# Altium PCB LSRO1AltiumTest.PcbDoc
Units mm, origin at the board's own origin, x right, y up, seen from the top; angles counter-clockwise.
Board outline 152.4 x 101.6 mm, 2 copper layers (Top Layer, Bottom Layer); 10 components, 0 nets, 189 pads, 0 vias.
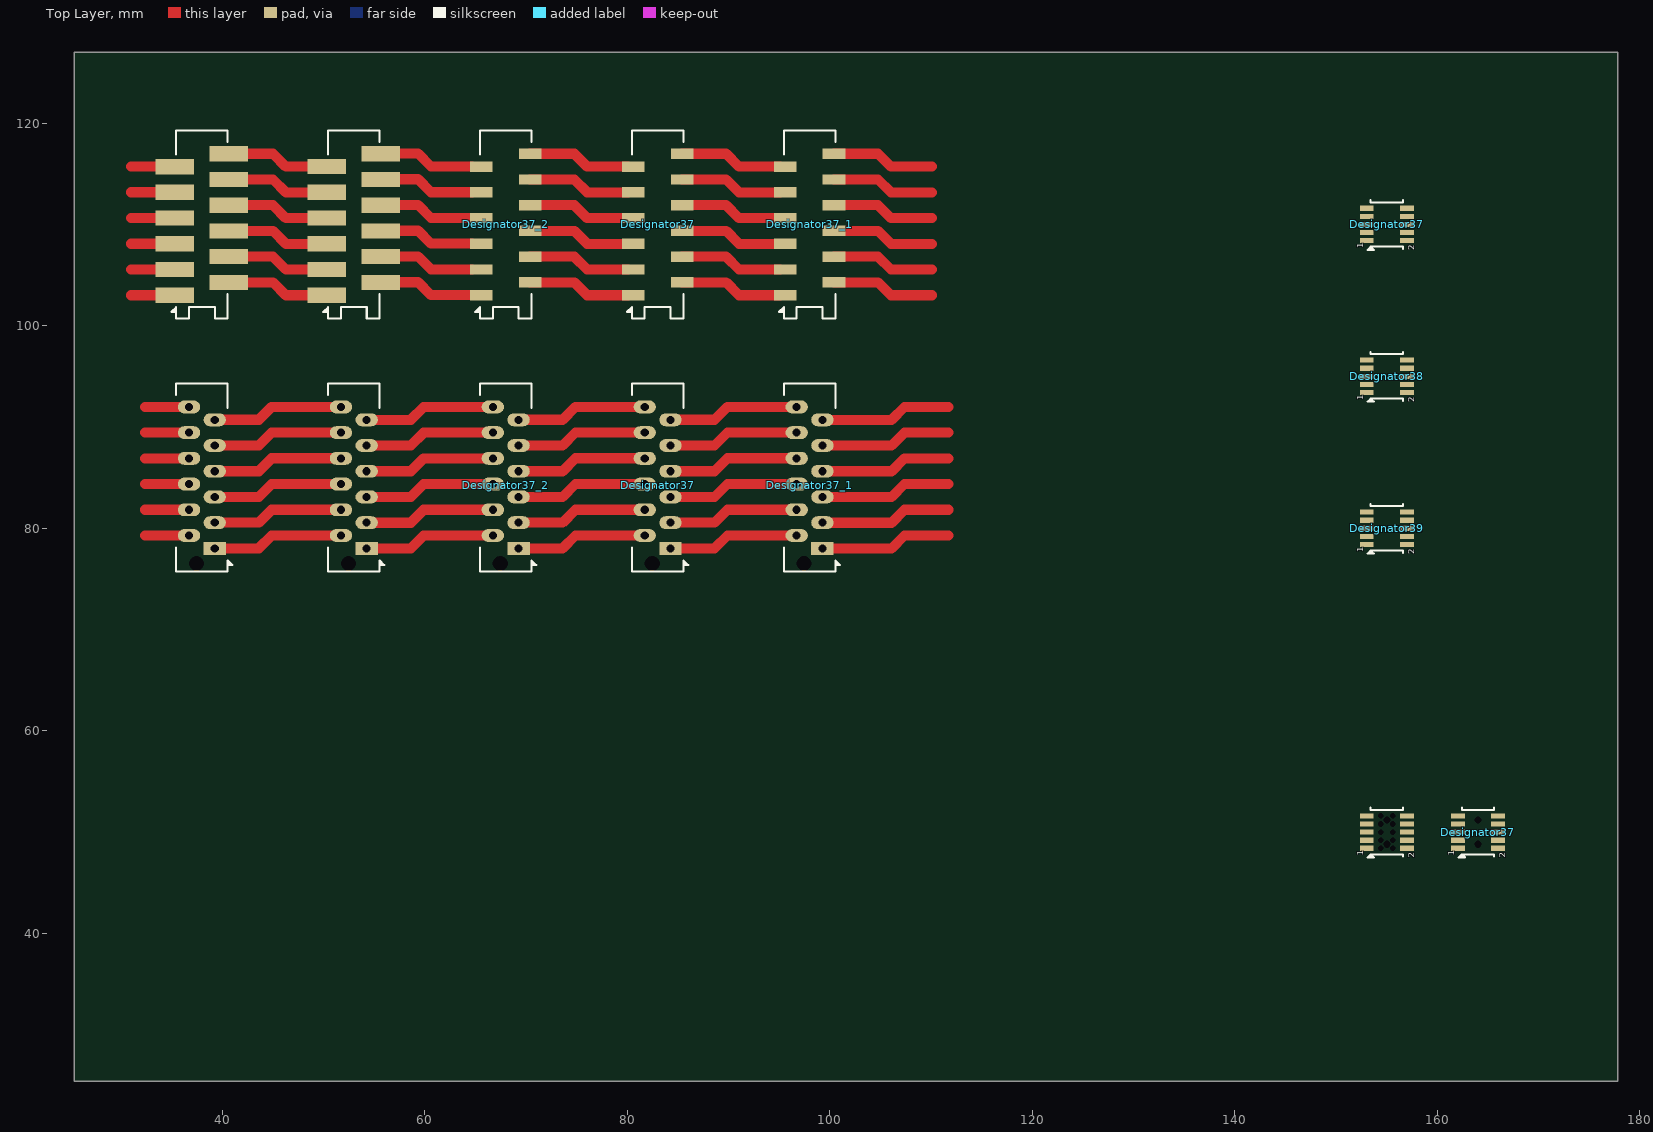
[diagram p0: Top Layer view]
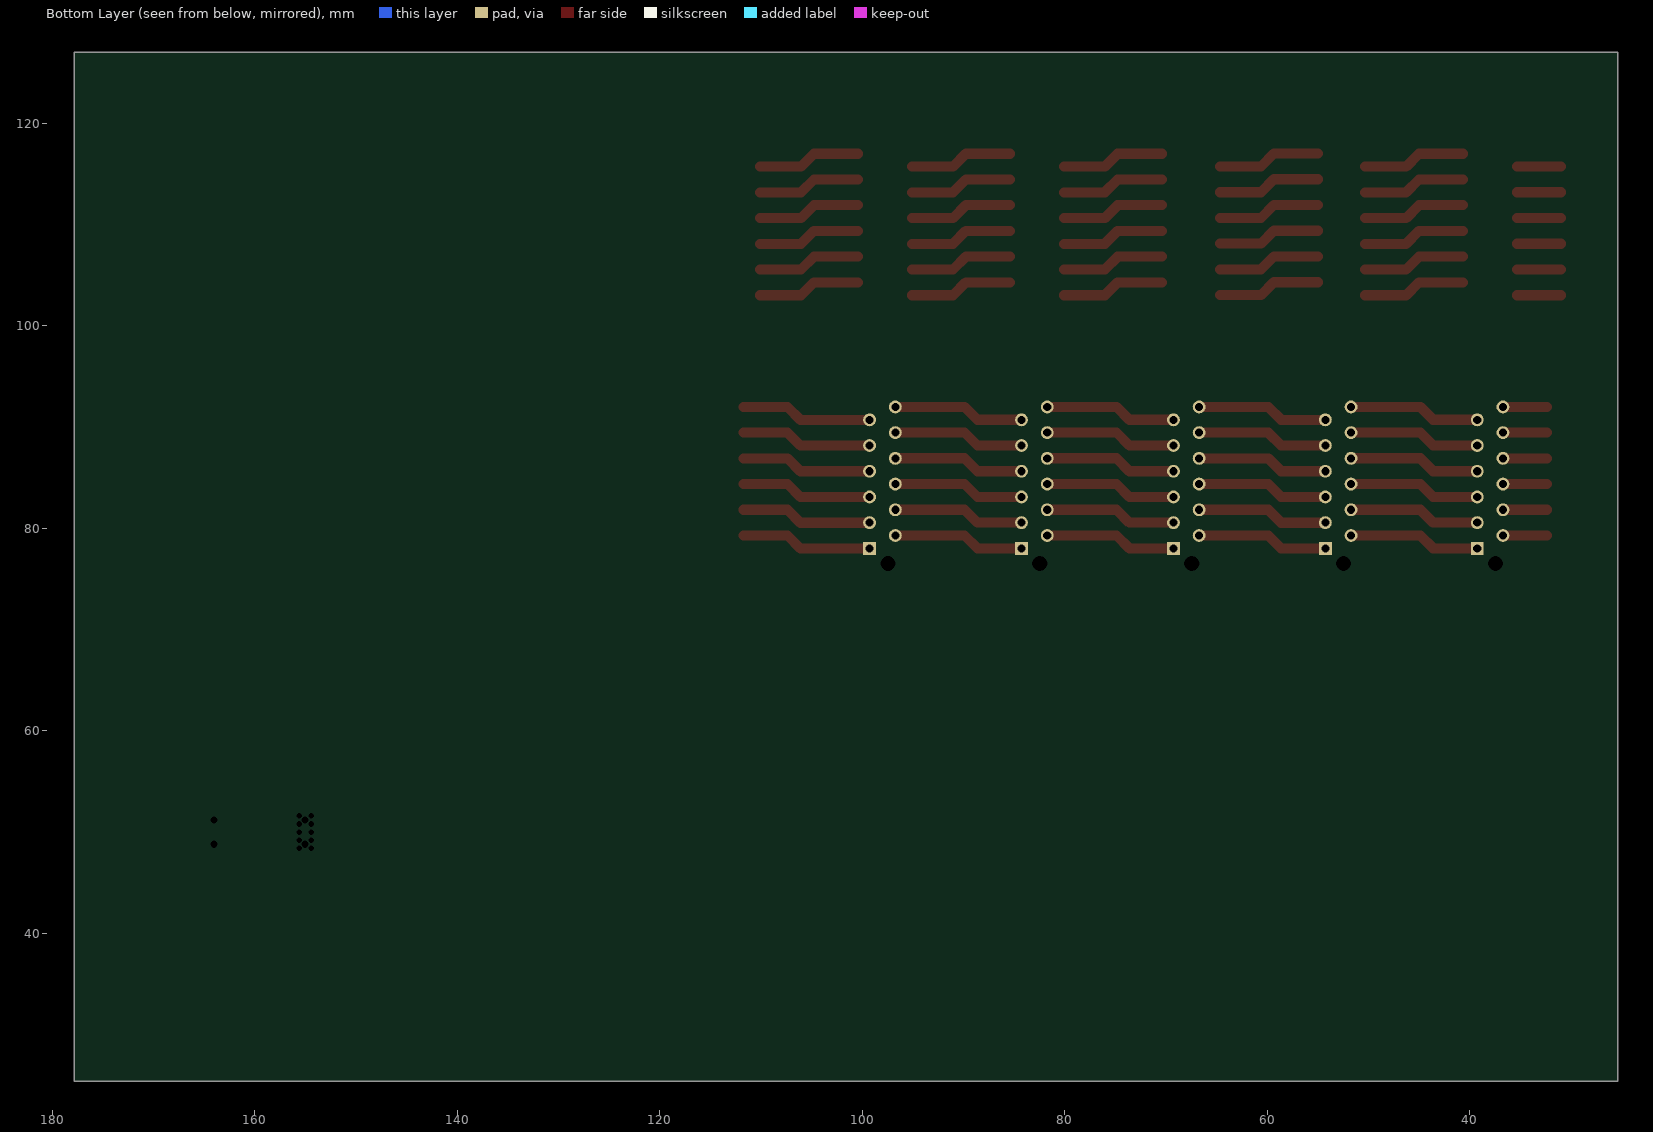
[diagram p1: Bottom Layer view, seen from below]

## Layer stack, top to bottom
Top Solder: solder mask 0.0102, Solder Resist, Dk 3.5
Top Layer: signal copper 0.0356
Dielectric1: dielectric 0.32, FR-4, Dk 4.8
Bottom Layer: signal copper 0.0356
Bottom Solder: solder mask 0.0102, Solder Resist, Dk 3.5

## Board outline
25.4,25.4 177.8,25.4 177.8,127 25.4,127

## Design rules (kind name [scope] priority, off if disabled: settings)
Clearance [All] p1: gap=0.254 ignorepadtopadclearanceinfootprint=FALSE except(0: Arc-Hole Track-Hole SMDPad-Hole THPad-Hole Via-Hole Fill-Hole Poly-Hole Region-Hole Text-Hole)
PolygonConnect [All] p1: connectstyle=Relief reliefconductorwidth=0.254 reliefentries=4 polygonreliefangle="90 Angle" airgapwidth=0.254
RoutingVias [All] p1: holewidth=0.711 width=1.27 viastyle="Through Hole" minholewidth=0.711 minwidth=1.27 maxholewidth=0.711 maxwidth=1.27
SilkToSolderMaskClearance SilkscreenOverComponentPads [IsPad] p1: minsilkscreentomaskgap=0.254 clearancetoexposedcopper=TRUE
SolderMaskExpansion [All] p1: expansion=0.102 istentingtop=FALSE
Width [All] p1: maxlimit=1 minlimit=0.254 preferedwidth=0.254 minimp=50.000000 maximp=50.000000 favimp=50.000000
29 further rules are at their usual default settings.

## Components (designator, comment, footprint, x,y, rotation, side; value= is the part's Value field where it differs from the comment)
Designator37 "Comment" LSRO_BHV-FV 155,110 r90 top
Designator37 "Comment" SAMTEC_CLE-105-01-G-DV-A 164,50 r90 top
Designator37 "Comment" TYCO_8-188275-2 83,110 r90 top
Designator37 "Comment" TYCO_8-215079-2 83,85 r180 top
Designator37_1 "Comment" TYCO_8-215079-2 98,85 r180 top
Designator37_1 "Comment" TYCO_8-188275-2 98,110 r90 top
Designator37_2 "Comment" TYCO_8-215079-2 68,85 r180 top
Designator37_2 "Comment" TYCO_8-188275-2 68,110 r90 top
Designator38 "Comment" LSRO_BHV-FV 155,95 r90 top
Designator39 "Comment" LSRO_BHV-FV 155,80 r90 top

## Footprints (in the part's own frame and the unit in brackets; to place one, negate y for a bottom-side part, rotate by r counter-clockwise, add the part's x,y. Pads: shape width x height; smd on the part's side, far side on the other; paste and mask are expansions set on the pad)
LSRO_BHV-FV [mm] "Connector Samtec for ISFC LSRO_BLUETOOTH on CLE serie, socket female, 2x5 leads, 0.8mm pitch"
  rect 0.508x1.37 smd: 1(-1.6,1.98) 2(-1.6,-1.98) 3(-0.8,1.98) 4(-0.8,-1.98) 5(0,1.98) 6(0,-1.98) 7(0.8,1.98) 8(0.8,-1.98) 9(1.6,1.98) 10(1.6,-1.98)
  silkscreen extent -2.5,-1.59 2.41,1.9, body extent -7.5,-12.83 7.5,10.56, height 31.27
SAMTEC_CLE-105-01-G-DV-A [mm] "Connector Samtec, CLE serie, socket female, 2x5 leads, 0.8mm pitch"
  round 0 hole 0.7 unplated mask+0.4: 0(-1.2,0) 0(1.2,0)
  rect 0.508x1.37 smd: 1(-1.6,1.98) 2(-1.6,-1.98) 3(-0.8,1.98) 4(-0.8,-1.98) 5(0,1.98) 6(0,-1.98) 7(0.8,1.98) 8(0.8,-1.98) 9(1.6,1.98) 10(1.6,-1.98)
  silkscreen extent -2.5,-1.59 2.41,1.9, body extent -2,-2.43 2,2.43, height 3.43
TYCO_8-188275-2 [mil] "Micro-Match 12 pins Female on board Vertical Smd connector"
  rect 40x87.99 smd: 1(-275,95) 2(-225,-95) 3(-175,95) 4(-125,-95) 5(-75,95) 6(-25,-95) 7(25,95) 8(75,-95) 9(125,95) 10(175,-95) 11(224.69,95) 12(275,-95)
  silkscreen extent -366,-100 366,119, body extent -367,-136 367,136, height 333
TYCO_8-215079-2 [mil] "Micro-Match 12 pins Female on board Vertical Truehole connector"
  rect 87x50 / inner rect 50x50 / far side rect 50x50 hole 31.5: 1(-50,275)
  oval 87x50 / inner round 50 / far side round 50 hole 31.5: 2(50,225) 3(-50,175) 4(50,125) 5(-50,75) 6(50,25) 7(-50,-25) 8(50,-75) 9(-50,-125) 10(50,-175) 11(-49.98,-224.69) 12(50,-275)
  round 0 hole 59.06 unplated mask+31.5: ""(20.98,334.02)
  silkscreen extent -119,-366 100,366, body extent -98,-367 98,367, height 283

## Free pads (board coordinates)
  round 0 hole 0.7 unplated mask+0.4: 0(155,48.8) 0(155,51.2)
  rect 3.81x1.499 smd: 1(35.333,103.015) 1(50.333,103.015) 2(40.667,104.285) 2(55.667,104.285) 3(35.333,105.555) 3(50.333,105.555) 4(40.667,106.825) 4(55.667,106.825) 5(35.333,108.095) 5(50.333,108.095) 6(40.667,109.365) 6(55.667,109.365) 7(35.333,110.635) 7(50.333,110.635) 8(40.667,111.905) 8(55.667,111.905) 9(35.333,113.175) 9(50.333,113.175) 10(40.667,114.445) 10(55.667,114.445) 11(35.333,115.707) 11(50.333,115.707) 12(40.667,116.985) 12(55.667,116.985)
  rect 2.21x1.27 / inner rect 1.27x1.27 / far side rect 1.27x1.27 hole 0.8: 1(39.27,78.015) 1(54.27,78.015)
  rect 1.37x0.508 smd: 1(153.02,48.4) 2(156.98,48.4) 3(153.02,49.2) 4(156.98,49.2) 5(153.02,50) 6(156.98,50) 7(153.02,50.8) 8(156.98,50.8) 9(153.02,51.6) 10(156.98,51.6)
  round 0 hole 0.559 unplated mask+0.33: 1(154.4,48.4) 2(155.6,48.4) 3(154.4,49.2) 4(155.6,49.2) 5(154.4,50) 6(155.6,50) 7(154.4,50.8) 8(155.6,50.8) 9(154.4,51.6) 10(155.6,51.6)
  oval 2.21x1.27 / inner round 1.27 / far side round 1.27 hole 0.8: 2(36.73,79.285) 2(51.73,79.285) 3(39.27,80.555) 3(54.27,80.555) 4(36.73,81.825) 4(51.73,81.825) 5(39.27,83.095) 5(54.27,83.095) 6(36.73,84.365) 6(51.73,84.365) 7(39.27,85.635) 7(54.27,85.635) 8(36.73,86.905) 8(51.73,86.905) 9(39.27,88.175) 9(54.27,88.175) 10(36.73,89.445) 10(51.73,89.445) 11(39.269,90.707) 11(54.269,90.707) 12(36.73,91.985) 12(51.73,91.985)
  round 0 hole 1.5 unplated mask+0.8: ""(37.467,76.516) ""(52.467,76.516)

## Nets (pads, with @x,y where several pads share a name; then routed paths per layer and width w, separated by ;. In a path a pad name is that pad's centre, name@x,y a point inside that pad or via, vN(x,y) a via of type N, cw(c..) or ccw(c..) an arc to the next point about the centre after c; other vN are vias at no path point)
pads on no net: Designator37. Designator37.0 Designator37.1 Designator37.2 Designator37.3 Designator37.4 Designator37.5 Designator37.6 Designator37.7 Designator37.8 Designator37.9 Designator37.10 Designator37.11 Designator37.12 Designator37_1. Designator37_1.1 Designator37_1.2 Designator37_1.3 Designator37_1.4 Designator37_1.5 Designator37_1.6 Designator37_1.7 Designator37_1.8 Designator37_1.9 Designator37_1.10 Designator37_1.11 Designator37_1.12 Designator37_2. Designator37_2.1 Designator37_2.2 Designator37_2.3 Designator37_2.4 Designator37_2.5 Designator37_2.6 Designator37_2.7 Designator37_2.8 Designator37_2.9 Designator37_2.10 Designator37_2.11 Designator37_2.12 Designator38.1 Designator38.2 Designator38.3 Designator38.4 Designator38.5 Designator38.6 Designator38.7 Designator38.8 Designator38.9 Designator38.10 Designator39.1 Designator39.2 Designator39.3 Designator39.4 Designator39.5 Designator39.6 Designator39.7 Designator39.8 Designator39.9 Designator39.10
copper on no net: | length 747.7
  Top Layer w1: 30.985,103.015 35.333,103.015 ; 30.985,105.555 35.333,105.555 ; 30.985,108.095 35.333,108.095 ; 30.985,110.635 35.333,110.635 ; 30.985,113.175 35.333,113.175 ; 30.985,115.715 35.333,115.715 ; 32.382,79.285 36.73,79.285 ; 32.382,81.825 36.73,81.825 ; 32.382,84.365 36.73,84.365 ; 32.382,86.905 36.73,86.905 ; 32.382,89.445 36.73,89.445 ; 32.382,91.985 36.73,91.985 ; 39.27,78.015 43.618,78.015 44.896,79.293 51.73,79.293 ; 39.27,80.555 43.618,80.555 44.896,81.833 51.73,81.833 ; 39.27,83.095 43.618,83.095 44.896,84.373 51.73,84.373 ; 39.27,85.635 43.618,85.635 44.896,86.913 51.73,86.913 ; 39.27,88.175 43.618,88.175 44.896,89.453 51.73,89.453 ; 39.27,90.715 43.618,90.715 44.896,91.993 51.73,91.993 ; 40.667,104.285 45.015,104.285 46.293,103.007 50.333,103.007 ; 40.667,106.825 45.015,106.825 46.293,105.547 50.333,105.547 ; 40.667,109.365 45.015,109.365 46.293,108.087 50.333,108.087 ; 40.667,111.905 45.015,111.905 46.293,110.627 50.333,110.627 ; 40.667,114.445 45.015,114.445 46.293,113.167 50.333,113.167 ; 40.667,116.985 45.015,116.985 46.293,115.707 50.333,115.707 ; 54.27,78.007 58.618,78.007 59.896,79.285 66.73,79.285 ; 54.27,80.547 58.618,80.547 59.896,81.825 66.73,81.825 ; 54.27,83.087 58.618,83.087 59.896,84.365 66.73,84.365 ; 54.27,85.627 58.618,85.627 59.896,86.905 66.73,86.905 ; 54.27,88.167 58.618,88.167 59.896,89.445 66.73,89.445 ; 54.27,90.707 58.618,90.707 59.896,91.985 66.73,91.985 ; 55,104.3 59.348,104.3 60.626,103.022 64.666,103.022 ; 55,106.84 59.348,106.84 60.626,105.562 64.666,105.562 ; 55,109.38 59.348,109.38 60.626,108.102 64.666,108.102 ; 55,111.92 59.348,111.92 60.626,110.642 64.666,110.642 ; 55,114.46 59.348,114.46 60.626,113.182 64.666,113.182 ; 55,117 59.348,117 60.626,115.722 64.666,115.722 ; 69.27,78.015 73.618,78.015 74.896,79.293 81.73,79.293 ; 69.27,80.555 73.618,80.555 74.896,81.833 81.73,81.833 ; 69.27,83.095 73.618,83.095 74.896,84.373 81.73,84.373 ; 69.27,85.635 73.618,85.635 74.896,86.913 81.73,86.913 ; 69.27,88.175 73.618,88.175 74.896,89.453 81.73,89.453 ; 69.27,90.715 73.618,90.715 74.896,91.993 81.73,91.993 ; 70.413,104.285 74.761,104.285 76.039,103.007 80.079,103.007 ; 70.413,106.825 74.761,106.825 76.039,105.547 80.079,105.547 ; 70.413,109.365 74.761,109.365 76.039,108.087 80.079,108.087 ; 70.413,111.905 74.761,111.905 76.039,110.627 80.079,110.627 ; 70.413,114.445 74.761,114.445 76.039,113.167 80.079,113.167 ; 70.413,116.985 74.761,116.985 76.039,115.707 80.079,115.707 ; 84.27,78.015 88.618,78.015 89.896,79.293 96.73,79.293 ; 84.27,80.555 88.618,80.555 89.896,81.833 96.73,81.833 ; 84.27,83.095 88.618,83.095 89.896,84.373 96.73,84.373 ; 84.27,85.635 88.618,85.635 89.896,86.913 96.73,86.913 ; 84.27,88.175 88.618,88.175 89.896,89.453 96.73,89.453 ; 84.27,90.715 88.618,90.715 89.896,91.993 96.73,91.993 ; 85.413,104.285 89.761,104.285 91.039,103.007 95.079,103.007 ; 85.413,106.825 89.761,106.825 91.039,105.547 95.079,105.547 ; 85.413,109.365 89.761,109.365 91.039,108.087 95.079,108.087 ; 85.413,111.905 89.761,111.905 91.039,110.627 95.079,110.627 ; 85.413,114.445 89.761,114.445 91.039,113.167 95.079,113.167 ; 85.413,116.985 89.761,116.985 91.039,115.707 95.079,115.707 ; 99.27,78.007 106.104,78.007 107.382,79.285 111.73,79.285 ; 99.27,80.547 106.104,80.547 107.382,81.825 111.73,81.825 ; 99.27,83.087 106.104,83.087 107.382,84.365 111.73,84.365 ; 99.27,85.627 106.104,85.627 107.382,86.905 111.73,86.905 ; 99.27,88.167 106.104,88.167 107.382,89.445 111.73,89.445 ; 99.27,90.707 106.104,90.707 107.382,91.985 111.73,91.985 ; 100.413,104.285 104.761,104.285 106.039,103.007 110.079,103.007 ; 100.413,106.825 104.761,106.825 106.039,105.547 110.079,105.547 ; 100.413,109.365 104.761,109.365 106.039,108.087 110.079,108.087 ; 100.413,111.905 104.761,111.905 106.039,110.627 110.079,110.627 ; 100.413,114.445 104.761,114.445 106.039,113.167 110.079,113.167 ; 100.413,116.985 104.761,116.985 106.039,115.707 110.079,115.707

## Silkscreen, mask and mechanical layers (free items; w line width, h text height)
Top Overlay:
  lines w0.2: 35.175,101.355 35.203,101.355 35.46,101.612 ; 35.46,78.11 35.46,75.715 40.54,75.715 40.54,76.84 41.025,76.355 40.544,76.355 40.54,76.351 ; 35.46,93.16 35.46,94.285 40.54,94.285 40.54,91.89 ; 35.46,101.351 35.456,101.355 34.975,101.355 35.46,101.84 35.46,100.715 ; 35.46,101.354 35.46,101.64 ; 35.46,116.89 35.46,119.285 40.54,119.285 40.54,118.16 ; 40.54,76.354 40.54,76.64 ; 40.54,76.612 40.797,76.355 40.825,76.355 ; 40.54,103.11 40.54,100.715 39.279,100.715 ; 50.175,101.355 50.203,101.355 50.46,101.612 ; 50.46,78.11 50.46,75.715 55.54,75.715 55.54,76.84 56.025,76.355 55.544,76.355 55.54,76.351 ; 50.46,93.16 50.46,94.285 55.54,94.285 55.54,91.89 ; 50.46,101.351 50.456,101.355 49.975,101.355 50.46,101.84 50.46,100.715 ; 50.46,101.354 50.46,101.64 ; 50.46,116.89 50.46,119.285 55.54,119.285 55.54,118.16 ; 55.54,76.354 55.54,76.64 ; 55.54,76.612 55.797,76.355 55.825,76.355 ; 55.54,103.11 55.54,100.715 54.279,100.715 ; 153.359,47.625 153.475,47.625 ; 153.41,52.19 153.41,52.415 ; 156.59,47.585 156.59,47.81 ; 156.59,52.19 156.59,52.415 ; 35.46,100.715 35.46,100.715 ; 35.46,100.715 36.721,100.715 36.721,101.84 ; 36.721,101.84 36.721,101.84 ; 36.721,101.84 39.279,101.84 39.279,100.715 ; 39.279,100.715 39.279,100.715 ; 50.46,100.715 51.721,100.715 51.721,101.84 ; 50.46,100.715 50.46,100.715 ; 51.721,101.84 54.279,101.84 54.279,100.715 ; 51.721,101.84 51.721,101.84 ; 54.279,100.715 54.279,100.715 ; 153.1,47.5 153.41,47.81 153.72,47.5 153.1,47.5
  lines w0.203: 153.41,47.81 156.59,47.81 ; 153.41,52.19 156.59,52.19
  text "1" at 152.65,47.65 h0.6 r90
  text "2" at 157.7,47.45 h0.6 r90
Mechanical 3:
  lines w0.1: 142.382,104.8 142.776,105.1 143.176,104.9 143.476,105 143.476,115 143.176,114.9 142.776,115.1 142.382,114.8 ; 143.476,107.95 146.524,107.95 146.524,112.05 143.476,112.05 ; 143.476,108.09 143.786,108.4 143.476,108.71
  text "PCB" at 142.9,108.8 h1.5 r90
  text "FTE" at 145.5,108.8 h1.5 r90
Mechanical 13:
  lines w0.1: 35.333,102.715 35.633,103.015 35.333,103.315 ; 35.333,102.815 35.533,103.015 35.333,103.215 ; 35.333,102.915 35.433,103.015 35.333,103.115 ; 40.667,77.715 40.367,78.015 40.667,78.315 ; 40.667,77.815 40.467,78.015 40.667,78.215 ; 40.667,77.915 40.567,78.015 40.667,78.115 ; 50.333,102.715 50.633,103.015 50.333,103.315 ; 50.333,102.815 50.533,103.015 50.333,103.215 ; 50.333,102.915 50.433,103.015 50.333,103.115 ; 55.667,77.715 55.367,78.015 55.667,78.315 ; 55.667,77.815 55.467,78.015 55.667,78.215 ; 55.667,77.915 55.567,78.015 55.667,78.115 ; 153.41,48.1 153.71,48.4 153.41,48.7 ; 153.41,48.2 153.61,48.4 153.41,48.6 ; 153.41,48.3 153.51,48.4 153.41,48.5 ; 35.333,75.602 40.667,75.602 40.667,94.398 35.333,94.398 35.333,75.602 ; 35.333,100.602 35.333,119.398 40.667,119.398 40.667,100.602 35.333,100.602 ; 50.333,75.602 50.333,94.398 55.667,94.398 55.667,75.602 50.333,75.602 ; 50.333,100.602 55.667,100.602 55.667,119.398 50.333,119.398 50.333,100.602 ; 153.41,47.81 156.59,47.81 156.59,52.19 153.41,52.19 153.41,47.81
  text ".Designator" at 38.175,109.2 h0.5 r90
  text ".Designator" at 53.175,109.2 h0.5 r90
  text ".Designator" at 37.85,85.825 h0.5 r270
  text ".Designator" at 52.85,85.825 h0.5 r270
Mechanical 15:
  lines w0.05: 34.833,103.015 35.333,103.015 ; 35.333,102.515 35.333,103.015 ; 35.333,103.515 35.333,103.015 ; 35.833,103.015 35.333,103.015 ; 37.5,85 38,85 ; 37.5,110 38,110 ; 38,84.5 38,85 ; 38,85.5 38,85 ; 38,109.5 38,110 ; 38,110.5 38,110 ; 38.5,85 38,85 ; 38.5,110 38,110 ; 38.77,78.015 39.27,78.015 ; 39.27,77.515 39.27,78.015 ; 39.27,78.515 39.27,78.015 ; 39.77,78.015 39.27,78.015 ; 49.833,103.015 50.333,103.015 ; 50.333,102.515 50.333,103.015 ; 50.333,103.515 50.333,103.015 ; 50.833,103.015 50.333,103.015 ; 52.5,85 53,85 ; 52.5,110 53,110 ; 53,84.5 53,85 ; 53,85.5 53,85 ; 53,109.5 53,110 ; 53,110.5 53,110 ; 53.5,85 53,85 ; 53.5,110 53,110 ; 53.77,78.015 54.27,78.015 ; 54.27,77.515 54.27,78.015 ; 54.27,78.515 54.27,78.015 ; 54.77,78.015 54.27,78.015 ; 32.925,101.78 32.925,116.97 34.833,116.97 34.833,119.898 41.167,119.898 41.167,118.22 43.075,118.22 43.075,103.03 41.167,103.03 41.167,100.102 34.833,100.102 34.833,101.78 32.925,101.78 ; 34.833,75.102 34.833,94.898 41.167,94.898 41.167,75.102 34.833,75.102 ; 47.925,101.78 49.833,101.78 49.833,100.102 56.167,100.102 56.167,103.03 58.075,103.03 58.075,118.22 56.167,118.22 56.167,119.898 49.833,119.898 49.833,116.97 47.925,116.97 47.925,101.78 ; 49.833,75.102 56.167,75.102 56.167,94.898 49.833,94.898 49.833,75.102
  lines w0.1: 153.9,48.4 154.4,48.4 ; 154.4,47.9 154.4,48.4 ; 154.4,48.9 154.4,48.4 ; 154.5,50 155,50 ; 154.9,48.4 154.4,48.4 ; 155,49.5 155,50 ; 155,50.5 155,50 ; 155.5,50 155,50 ; 151.775,47.6 152.86,47.6 152.86,47.26 157.14,47.26 157.14,47.6 158.225,47.6 158.225,52.4 157.14,52.4 157.14,52.74 152.86,52.74 152.86,52.4 151.775,52.4 151.775,47.6

## Text inside footprints (layer, text, board x,y; h text height)
Designator37: Top Overlay "1" at 152.65,107.65 h0.6 r90; Top Overlay "2" at 157.7,107.45 h0.6 r90; Mechanical 3 "FTE" at 155.5,108.8 h1.5 r90; Mechanical 3 "Vertical PCB" at 172,105.4 h1 r90; Mechanical 3 "Bluetooth" at 164.2,105.8 h1 r90
Designator37: Top Overlay "2" at 166.7,47.45 h0.6 r90; Top Overlay "1" at 161.65,47.65 h0.6 r90; Mechanical 3 "FTE" at 164.5,48.8 h1.5 r90; Mechanical 3 "PCB" at 161.9,48.8 h1.5 r90
Designator38: Top Overlay "2" at 157.7,92.45 h0.6 r90; Top Overlay "1" at 152.65,92.65 h0.6 r90; Mechanical 3 "Bluetooth" at 164.2,90.8 h1 r90; Mechanical 3 "Vertical PCB" at 172,90.4 h1 r90; Mechanical 3 "FTE" at 155.5,93.8 h1.5 r90
Designator39: Top Overlay "1" at 152.65,77.65 h0.6 r90; Top Overlay "2" at 157.7,77.45 h0.6 r90; Mechanical 3 "FTE" at 155.5,78.8 h1.5 r90; Mechanical 3 "Vertical PCB" at 172,75.4 h1 r90; Mechanical 3 "Bluetooth" at 164.2,75.8 h1 r90